# EAGLE board tinyduino-breakout-mk-5.1 (EAGLE 7.5.0)
VERSION: v5.1
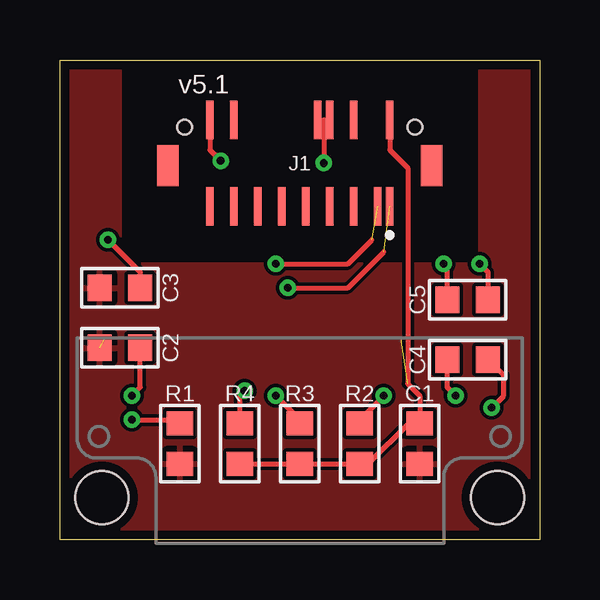
[diagram p0: board, top side]
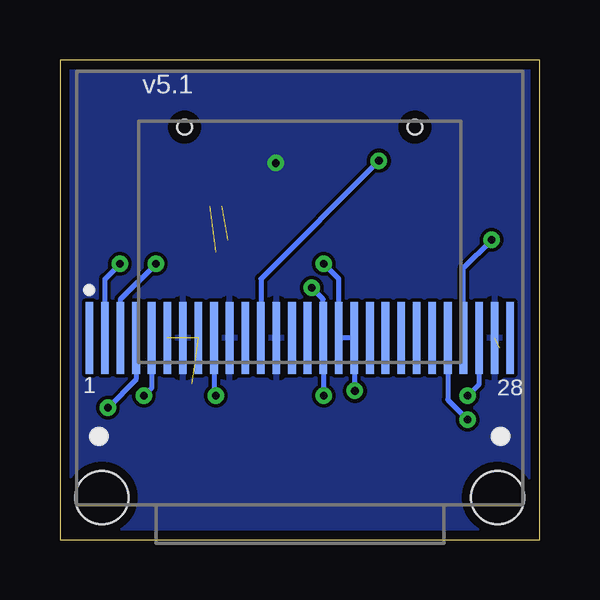
[diagram p1: board, bottom side, seen from below]

Size 20 x 20 mm. Coordinates in mm from the lower left corner, seen from the top.
Outline: 20,0 0,0 0,20 20,20 20,0
Copper layers (1*16): Top 0.0356mm / dielectric 1.5011mm / Bottom 0.0356mm
Design rules "LaenPCBOrder_2": minimum track width 6mil, minimum drill 13mil, track to track 6mil, track to pad 6mil, pad to pad 6mil, via to via 6mil, smd to smd 6mil, copper to edge 15mil, drill to drill 6mil, minimum pad ring 7mil, minimum via ring 7mil, stop-mask expansion 3mil, vias tented up to drill 20mil, thermal gap 10mil
Holes 2.2 mm at 1.75,1.75 18.25,1.75

## Footprints (pad centres in the part's own frame; a part is rotated, then mirrored left to right if it is on the bottom)
C0603 = smd 1 x 1.1: 1 -0.85,0; 2 0.85,0
ER-OLED0.66-1-FOLDED-SAME = smd 0.32 x 3: 1 -8.775,0; 2 -8.125,0; 3 -7.475,0; 4 -6.825,0; 5 -6.175,0; 6 -5.525,0; 7 -4.875,0; 8 -4.225,0; 9 -3.575,0; 10 -2.925,0; 11 -2.275,0; 12 -1.625,0; 13 -0.975,0; 14 -0.325,0; 15 0.325,0; 16 0.975,0; 17 1.625,0; 18 2.275,0; 19 2.925,0; 20 3.575,0; 21 4.225,0; 22 4.875,0; 23 5.525,0; 24 6.175,0; 25 6.825,0; 26 7.475,0; 27 8.125,0; 28 8.775,0
DF12-32-DP-I2C+EXTRA-REV = smd 0.3 x 1.6 bottom: 1 -3.75,-1.8; 2 -3.75,1.8; 3 -3.25,-1.8; 7 -2.25,-1.8; 8 -2.25,1.8; 11 -1.25,-1.8; 12 -1.25,1.8; 14 -0.75,1.8; 15 -0.25,-1.8; 19 0.75,-1.8; 23 1.75,-1.8; 27 2.75,-1.8; 28 2.75,1.8; 31 3.75,-1.8; 32 3.75,1.8 | smd 0.9 x 1.7 bottom: F1 -5.5,-0.1; F2 5.5,-0.1 | hole 0.6: -4.8,1.5; 4.8,1.5
R0603 = smd 1 x 1.1: 1 -0.85,0; 2 0.85,0

## Placement (x,y rotation side)
C1  1u  [C0603]  15,4 270 top
C2  2u2  [C0603]  2.5,8 180 top
C3  4u7  [C0603]  2.5,10.5 180 top
C4  1u  [C0603]  17,7.5 180 top
C5  1u  [C0603]  17,10 180 top
DISP1  ER-OLED0.66-1FOLDED-SAME  [ER-OLED0.66-1-FOLDED-SAME]  10,8.4 0 bottom
FRAME1  FRAME-LETTERNO_PACKAGE  [DUMMY]  20,0 0 bottom
J1  DF12-32-DP-NOTREALLYREV  [DF12-32-DP-I2C+EXTRA-REV]  10,15.7 0 bottom
R1  390K  [R0603]  5,4 90 top
R2  100K  [R0603]  12.5,4 270 top
R3  4K7  [R0603]  10,4 270 top
R4  4K7  [R0603]  7.5,4 270 top

## Library data of the parts
C1-C5 DISP1 J1 R1-R4 = a_parts
FRAME1 = A_butts; DESIGNER: sean@yak.net; VERSION: v5.1

## Nets
DRST: DISP1.12 J1.32
GND: C1.2 C2.2 C3.2 DISP1.7 DISP1.10 DISP1.13 DISP1.27 J1.12 J1.14 R1.1
N$1: C2.1 DISP1.26
N$2: C3.1 DISP1.25
N$3: DISP1.24 R1.2
N$4: C4.1 DISP1.4
N$5: C4.2 DISP1.5
N$6: C5.1 DISP1.2
N$7: C5.2 DISP1.3
N$9: DISP1.9 R2.1
SCL: DISP1.16 J1.1 R3.1
SDA: DISP1.17 DISP1.18 J1.3 R4.1
VCC: C1.1 DISP1.6 DISP1.8 J1.2 R2.2 R3.2 R4.2
VUSB: J1.8

## Tracks (layer width: path | path; a pad name or v marks a point on that pad's centre or on a via)
DRST  (via drill 0.33)
  Top 0.2: J1.32 6.25,16.25 v6.7,15.8
  Bottom 0.2: v6.7,15.8 11.62,10.88 DISP1.12
GND  (via drill 0.33)  (1 unrouted)
  Top 0.2: J1.12 11,17.5 | 11,17.5 v11,15.7 | J1.14 11,17.5
  pour Top: 0,20 0,0 20,0 20,20 17.5,20 17.5,11.5 2.5,11.5 2.5,20
  pour Bottom: 0,0 20,0 20,20 0,20
N$1  (via drill 0.33)
  Top 0.2: v3,6 3.35,6.35 C2.1
  Bottom 0.2: DISP1.26 2.52,6.47 v3,6
N$2  (via drill 0.33)
  Top 0.2: v2,12.5 3.35,11.15 C3.1
  Bottom 0.2: DISP1.25 3.17,11.32 v2,12.5
N$3  (via drill 0.33)
  Top 0.2: v3,5 4.85,5 R1.2
  Bottom 0.2: DISP1.24 3.83,5.83 v3,5
N$4  (via drill 0.33)
  Top 0.2: v18,5.5 18.5,6 18.5,6.85 C4.1
  Bottom 0.2: DISP1.4 16.82,6.67 v18,5.5
N$5  (via drill 0.33)
  Top 0.2: v16.5,6 16.15,6.35 C4.2
  Bottom 0.2: DISP1.5 16.18,6.33 v16.5,6
N$6  (via drill 0.33)
  Top 0.2: v17.5,11.5 17.85,11.15 C5.1
  Bottom 0.2: DISP1.2 18.12,10.88 v17.5,11.5
N$7  (via drill 0.33)
  Top 0.2: C5.2 16.15,11.35 v16,11.5
  Bottom 0.2: DISP1.3 17.48,10.03 v16,11.5
N$9  (via drill 0.33)
  Top 0.2: v13.5,6 12.5,5 R2.1
  Bottom 0.2: DISP1.9 13.57,6.08 v13.5,6
SCL  (via drill 0.33)  (1 unrouted)
  Top 0.2: v9.5,10.5 12,10.5 13.5,12 | R3.1 10,5 v9,6
  Bottom 0.2: v9.5,10.5 9.03,10.03 DISP1.16 9,8.38 v9,6
SDA  (via drill 0.33)  (1 unrouted)
  Top 0.2: v9,11.5 12,11.5 13,12.5 | R4.1 7.5,6 v7.7,6.2
  Bottom 0.2: v9,11.5 8.38,10.88 DISP1.17 DISP1.18 7.7,8.38 v7.7,6.2
VCC  (2 unrouted)
  Top 0.2: R4.2 R3.2 R2.2 12.85,3.15 14.55,4.85 C1.1 15,6 14.5,6.5 14.5,15.5 13.75,16.25 J1.2

## Text on the board
tPlace: Dosimeter | UV
bPlace: by schizobovine <sean@yak.net> / CC-4.0-BY-SA | Tinyduino + Adafruit Si1145 | UV Dosimeter